# EAGLE board ShieldMega - LC (EAGLE 6.2)
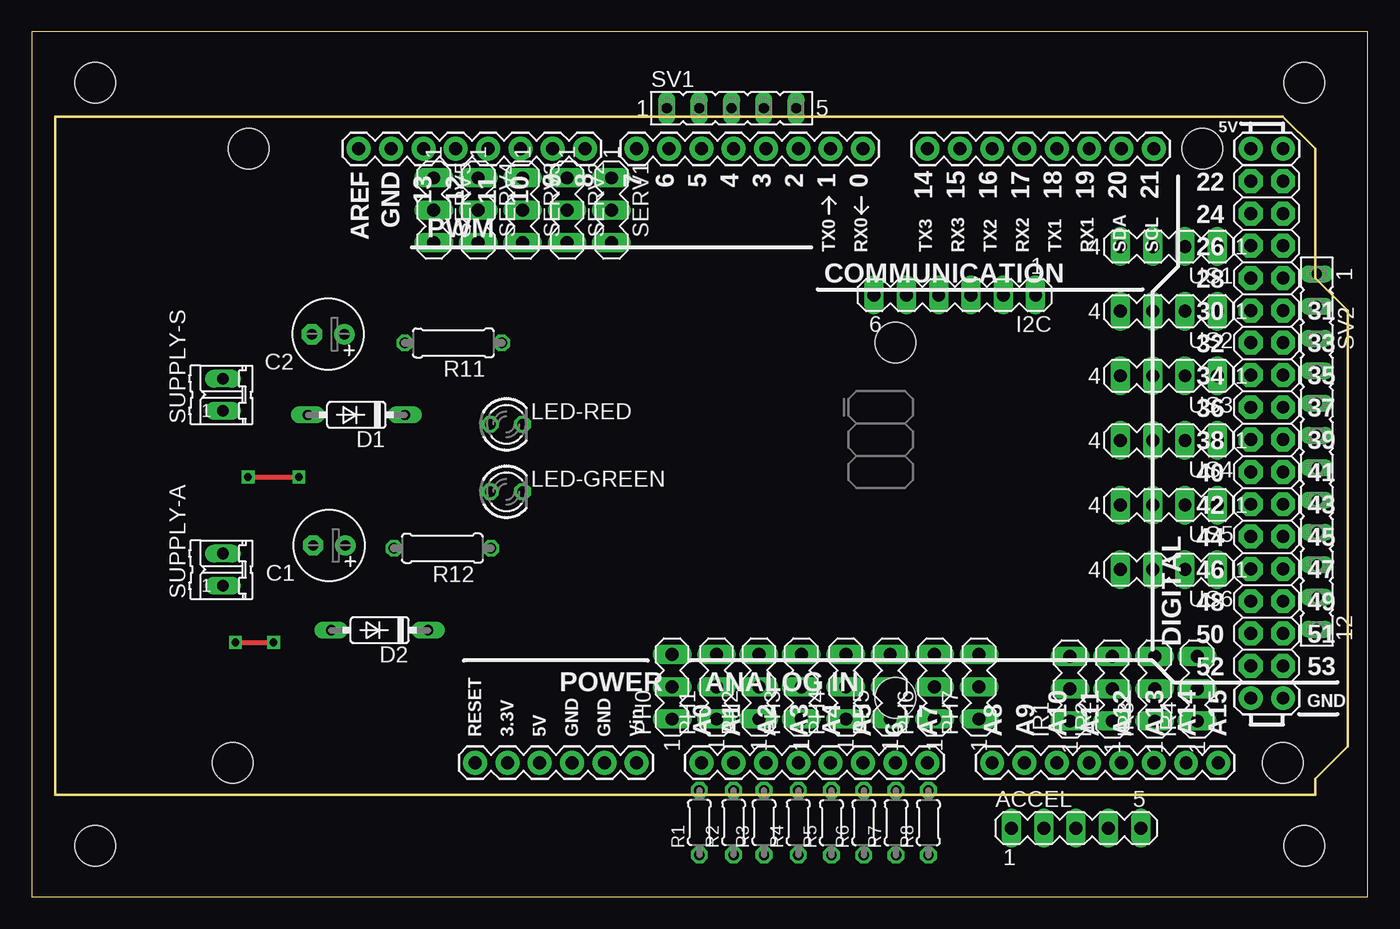
[diagram p0: board, top side]
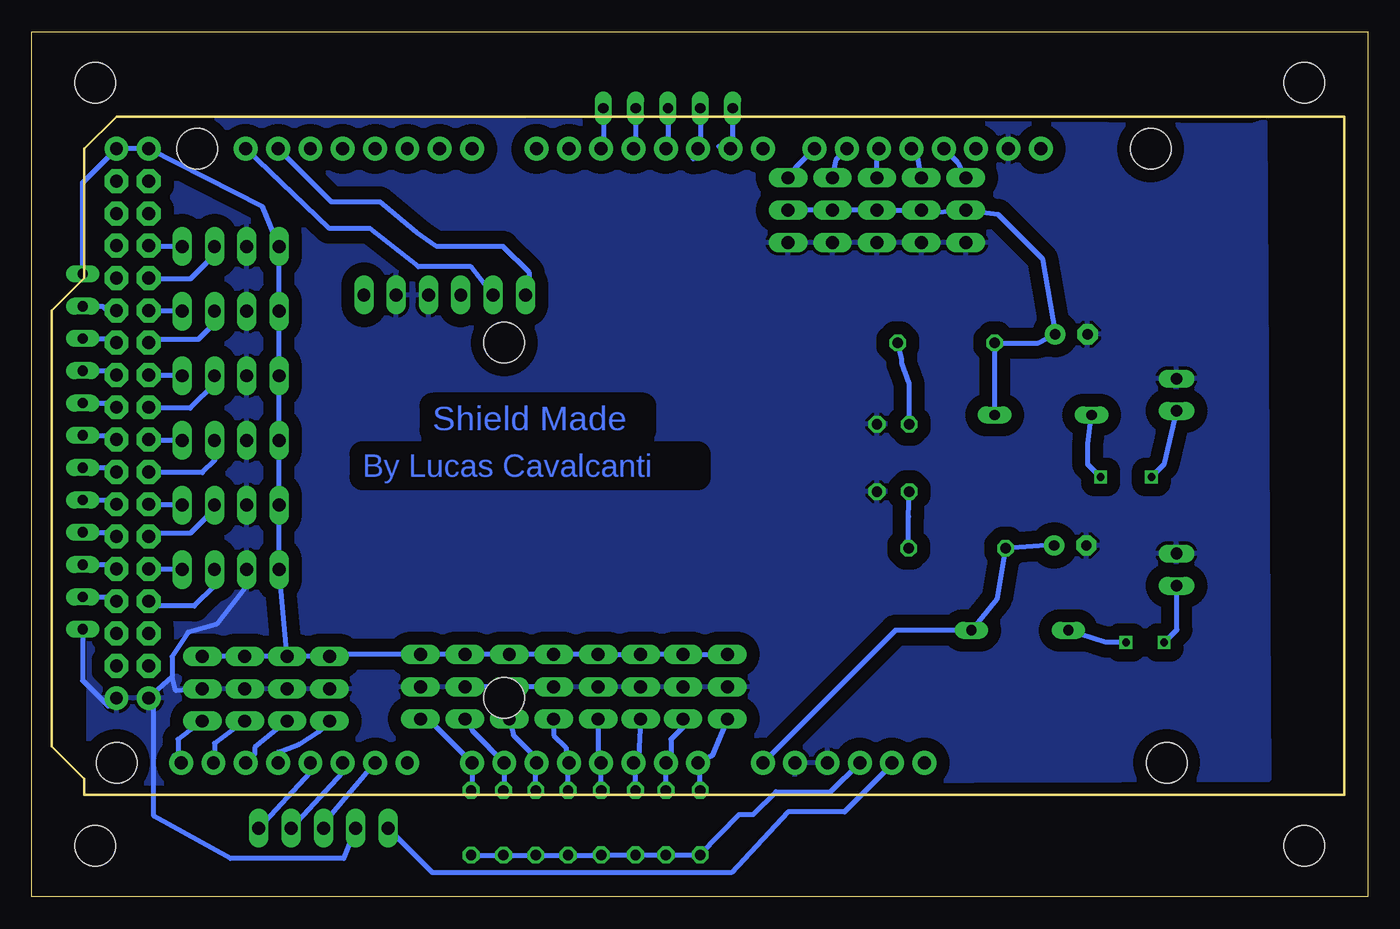
[diagram p1: board, bottom side, seen from below]

Size 105 x 68 mm. Coordinates in mm from the lower left corner, seen from the top.
Outline: 0,0 105,0 105,68 0,68 0,0
Copper layers (1*16): Top 0.035mm / dielectric 1.5mm / Bottom 0.035mm
Design rules: minimum track width 10mil, minimum drill 24mil, track to track 8mil, track to pad 8mil, pad to pad 8mil, via to via 8mil, smd to smd 5mil, copper to edge 0mil, drill to drill 0mil, minimum pad ring 10mil, minimum via ring 8mil, stop-mask expansion 4mil, vias tented up to drill 0mil, thermal gap 10mil
Holes 3.2 mm at 5,4 5,64 100,64 100,4

## Footprints (pad centres in the part's own frame; a part is rotated, then mirrored left to right if it is on the bottom)
MA05-1 = drill 1.016 long: 1 -5.08,0; 2 -2.54,0; 3 0,0; 4 2.54,0; 5 5.08,0
E2,5-6 = drill 0.813 pad 1.6: + -1.27,0 | drill 0.813 pad 1.6 octagon: - 1.27,0
DO35-7 = drill 0.813 long: A 3.81,0; C -3.81,0
MA06-1 = drill 1.016 long: 1 -6.35,0; 2 -3.81,0; 3 -1.27,0; 4 1.27,0; 5 3.81,0; 6 6.35,0
MA03-1 = drill 1.016 long: 1 -2.54,0; 2 0,0; 3 2.54,0
LED3MM = drill 0.813 octagon: A -1.27,0; K 1.27,0
0204/5 = drill 0.813 octagon: 1 -2.54,0; 2 2.54,0
0207/7 = drill 0.813 octagon: 1 -3.81,0; 2 3.81,0
02P = drill 0.914 long: 1 -1.27,0; 2 1.27,0
FE05-1 = drill 0.813 long: 1 -5.08,0; 2 -2.54,0; 3 0,0; 4 2.54,0; 5 5.08,0
FE12 = drill 0.813 long: 1 -13.97,0; 2 -11.43,0; 3 -8.89,0; 4 -6.35,0; 5 -3.81,0; 6 -1.27,0; 7 1.27,0; 8 3.81,0; 9 6.35,0; 10 8.89,0; 11 11.43,0; 12 13.97,0
ARDUINO_MEGA = drill 1.016 pad 1.88: 0 63.5,50.8; 1 60.96,50.8; 2 58.42,50.8; 3 55.88,50.8; 3.3V 35.56,2.54; 4 53.34,50.8; 5 50.8,50.8; 5V@0 38.1,2.54; 5V@1 93.98,50.8; 5V@2 96.52,50.8; 6 48.26,50.8; 7 45.72,50.8; 8 41.656,50.8; 9 39.116,50.8; 10 36.576,50.8; 11 34.036,50.8; 12 31.496,50.8; 13 28.956,50.8; 14 68.58,50.8; 15 71.12,50.8; 16 73.66,50.8; 17 76.2,50.8; 18 78.74,50.8; 19 81.28,50.8; 20 83.82,50.8; 21 86.36,50.8; A0 50.8,2.54; A1 53.34,2.54; A2 55.88,2.54; A3 58.42,2.54; A4 60.96,2.54; A5 63.5,2.54; A6 66.04,2.54; A7 68.58,2.54; A8 73.66,2.54; A9 76.2,2.54; A10 78.74,2.54; A11 81.28,2.54; A12 83.82,2.54; A13 86.36,2.54; A14 88.9,2.54; A15 91.44,2.54; AREF 23.876,50.8; GND@0 40.64,2.54; GND@1 43.18,2.54; GND@2 93.98,7.62; GND@3 96.52,7.62; GND@4 26.416,50.8; RESET 33.02,2.54; VIN 45.72,2.54 | drill 1.016 pad 1.88 octagon: 22 93.98,48.26; 23 96.52,48.26; 24 93.98,45.72; 25 96.52,45.72; 26 93.98,43.18; 27 96.52,43.18; 28 93.98,40.64; 29 96.52,40.64; 30 93.98,38.1; 31 96.52,38.1; 32 93.98,35.56; 33 96.52,35.56; 34 93.98,33.02; 35 96.52,33.02; 36 93.98,30.48; 37 96.52,30.48; 38 93.98,27.94; 39 96.52,27.94; 40 93.98,25.4; 41 96.52,25.4; 42 93.98,22.86; 43 96.52,22.86; 44 93.98,20.32; 45 96.52,20.32; 46 93.98,17.78; 47 96.52,17.78; 48 93.98,15.24; 49 96.52,15.24; 50 93.98,12.7; 51 96.52,12.7; 52 93.98,10.16; 53 96.52,10.16 | hole 3.2: 15.24,50.8; 13.97,2.54; 66.04,35.56; 66.04,7.62; 90.17,50.8; 96.52,2.54
MA04-1 = drill 1.016 long: 1 -3.81,0; 2 -1.27,0; 3 1.27,0; 4 3.81,0

## Placement (x,y rotation side)
ACCEL  [MA05-1]  82.07,5.4 0 top
C1  [E2,5-6]  23.38,27.62 180 top
C2  [E2,5-6]  23.29,44.23 180 top
D1  1N4148DO35-7  [DO35-7]  25.51,37.88 180 top
D2  1N4148DO35-7  [DO35-7]  27.34,20.95 180 top
I2C  [MA06-1]  72.55,47.31 180 top
IR1  [MA03-1]  81.6,16.35 90 top
IR2  [MA03-1]  84.93,16.35 90 top
IR3  [MA03-1]  88.27,16.35 90 top
IR4  [MA03-1]  91.6,16.35 90 top
LED-GREEN  [LED3MM]  37.31,31.84 0 top
LED-RED  [LED3MM]  37.31,37.15 0 top
PH0  [MA03-1]  50.32,16.51 90 top
PH1  [MA03-1]  53.82,16.51 90 top
PH2  [MA03-1]  57.15,16.51 90 top
PH3  [MA03-1]  60.48,16.51 90 top
PH4  [MA03-1]  63.98,16.51 90 top
PH5  [MA03-1]  67.47,16.51 90 top
PH6  [MA03-1]  70.96,16.51 90 top
PH7  [MA03-1]  74.45,16.51 90 top
R1  [0204/5]  52.47,5.83 90 top
R2  [0204/5]  55.16,5.83 90 top
R3  [0204/5]  57.54,5.83 90 top
R4  [0204/5]  60.24,5.83 90 top
R5  [0204/5]  62.85,5.82 90 top
R6  [0204/5]  65.39,5.82 90 top
R7  [0204/5]  67.93,5.82 90 top
R8  [0204/5]  70.47,5.82 90 top
R11  200  [0207/7]  33.13,43.55 180 top
R12  200  [0207/7]  32.27,27.4 180 top
SERV1  [MA03-1]  45.56,53.98 270 top
SERV2  [MA03-1]  42.07,53.98 270 top
SERV3  [MA03-1]  38.58,53.98 270 top
SERV4  [MA03-1]  35.08,53.98 270 top
SERV5  [MA03-1]  31.59,53.98 270 top
SUPPLY-A  [02P]  15.03,25.72 90 top
SUPPLY-S  [02P]  15.03,39.47 90 top
SV1  [FE05-1]  55,62 0 top
SV2  [FE12]  101,35 270 top
U1  ARDUINO-MEGAFULL  [ARDUINO_MEGA]  1.82,8 0 top
US1  [MA04-1]  89.38,51.12 180 top
US2  [MA04-1]  89.38,46.04 180 top
US3  [MA04-1]  89.38,40.96 180 top
US4  [MA04-1]  89.38,35.88 180 top
US5  [MA04-1]  89.38,30.8 180 top
US6  [MA04-1]  89.38,25.72 180 top

## Library data of the parts
ACCEL I2C IR1-IR4 PH0 PH1-PH7 SERV1-SERV5 US1-US6 = con-lstb; OC_FARNELL: unknown; OC_NEWARK: unknown
C1 C2 R1-R8 R11 R12 = rcl
D1 D2 = diode
LED-GREEN LED-RED = led
SUPPLY-A SUPPLY-S = con-amp-quick; OC_FARNELL: unknown; OC_NEWARK: unknown
SV1 SV2 = con-lsta; OC_FARNELL: unknown; OC_NEWARK: unknown
U1 = SparkFun-Boards

## Nets
3V3: ACCEL.1 U1.3.3V
5V: R1.1 R2.1 R3.1 R4.1 R5.1 R6.1 R7.1 R8.1 U1.5V@0
5VU: IR1.3 IR2.3 IR3.3 IR4.3 PH0.3 PH1.3 PH2.3 PH3.3 PH4.3 PH5.3 PH6.3 PH7.3 SV2.1 U1.5V@1 U1.5V@2 US1.4 US2.4 US3.4 US4.4 US5.4 US6.4
31: SV2.2 U1.31
33: SV2.3 U1.33
35: SV2.4 U1.35
37: SV2.5 U1.37
39: SV2.6 U1.39
41: SV2.7 U1.41
43: SV2.8 U1.43
45: SV2.9 U1.45
47: SV2.10 U1.47
49: SV2.11 U1.49
A0: PH0.1 R1.2 U1.A0
A1: PH1.1 R2.2 U1.A1
A2: PH2.1 R3.2 U1.A2
A3: PH3.1 R4.2 U1.A3
A4: PH4.1 R5.2 U1.A4
A5: PH5.1 R6.2 U1.A5
A6: PH6.1 R7.2 U1.A6
A7: PH7.1 R8.2 U1.A7
ECHO1: U1.28 US1.2
ECHO2: U1.32 US2.2
ECHO3: U1.36 US3.2
ECHO4: U1.40 US4.2
ECHO5: U1.44 US5.2
ECHO6: U1.48 US6.2
GND: ACCEL.2 C1.- C2.- I2C.2 I2C.3 IR1.2 IR2.2 IR3.2 IR4.2 LED-GREEN.K LED-RED.K PH0.2 PH1.2 PH2.2 PH3.2 PH4.2 PH5.2 PH6.2 PH7.2 SERV1.3 SERV2.3 SERV3.3 SERV4.3 SERV5.3 SUPPLY-A.2 SUPPLY-S.2 SV2.12 U1.GND@0 U1.GND@1 U1.GND@2 U1.GND@3 U1.GND@4 US1.3 US2.3 US3.3 US4.3 US5.3 US6.3
IR1: IR1.1 U1.A12
IR2: IR2.1 U1.A13
IR3: IR3.1 U1.A14
IR4: IR4.1 U1.A15
N$1: D2.A SUPPLY-A.1
N$2: SV1.5 U1.2
N$3: D1.A SUPPLY-S.1
N$4: SV1.4 U1.3
N$5: SV1.3 U1.4
N$6: SV1.2 U1.5
N$7: SV1.1 U1.6
N$9: LED-GREEN.A R12.1
N$10: LED-RED.A R11.1
PWM1: SERV1.1 U1.8
PWM2: SERV2.1 U1.9
PWM3: SERV3.1 U1.10
PWM4: SERV4.1 U1.11
PWM5: SERV5.1 U1.12
SCL: I2C.5 U1.21
SDA: I2C.6 U1.20
TRIG1: U1.26 US1.1
TRIG2: U1.30 US2.1
TRIG3: U1.34 US3.1
TRIG4: U1.38 US4.1
TRIG5: U1.42 US5.1
TRIG6: U1.46 US6.1
VIN-A: C1.+ D2.C R12.2 U1.VIN
VIN-S: C2.+ D1.C R11.2 SERV1.2 SERV2.2 SERV3.2 SERV4.2 SERV5.2
X: ACCEL.3 U1.A9
Y: ACCEL.4 U1.A10
Z: ACCEL.5 U1.A11

## Tracks (layer width: path | path; a pad name or v marks a point on that pad's centre or on a via)
3V3
  Bottom 0.406: U1.3.3V 37.38,10.4 41.12,6.67 45.56,6.67 50.01,1.91 73.5,1.91 ACCEL.1
5V
  Bottom 0.406: R8.1 R7.1 R6.1 R5.1 60.89,3.28 R4.1 R3.1 R2.1 R1.1 49.39,6.47 48.3,6.47 46.51,8.26 42.21,8.26 U1.5V@0
5VU
  Bottom 0.406: IR2.3 IR1.3 82.39,19.05 PH7.3 PH6.3 PH5.3 PH4.3 PH3.3 PH2.3 PH1.3 PH0.3 | IR2.3 IR3.3 IR4.3 | IR2.3 US6.4 US5.4 US4.4 US3.4 US2.4 | 85.57,46.67 US2.4 | US2.4 US1.4 86.84,54.24 U1.5V@1 U1.5V@2 101,56.14 SV2.1
31
  Bottom 0.406: SV2.2 99.43,46.43 99,46 98.44,46 U1.31
33
  Bottom 0.406: SV2.3 98.67,43.89 U1.33
35
  Bottom 0.406: SV2.4 98.67,41.35 U1.35
37
  Bottom 0.406: SV2.5 98.67,38.81 U1.37
39
  Bottom 0.406: SV2.6 98.67,36.27 U1.39
41
  Bottom 0.406: SV2.7 98.67,33.73 U1.41
43
  Bottom 0.406: SV2.8 98.67,31.19 U1.43
45
  Bottom 0.406: SV2.9 98.67,28.65 U1.45
47
  Bottom 0.406: SV2.10 98.67,26.11 U1.47
49
  Bottom 0.406: SV2.11 98.67,23.57 U1.49
A0
  Bottom 0.406: R1.2 52.47,10.38 U1.A0 52.55,10.62 51.55,11.06 PH0.1
A1
  Bottom 0.406: R2.2 U1.A1 54.77,10.94 54.77,12.38 53.82,13.34 PH1.1
A2
  Bottom 0.406: R3.2 57.54,10.38 U1.A2 57.31,10.94 PH2.1
A3
  Bottom 0.406: R4.2 U1.A3 60.48,10.78 PH3.1
A4
  Bottom 0.406: R5.2 62.85,10.47 U1.A4 63.02,10.78 63.02,11.75 63.98,12.7 PH4.1
A5
  Bottom 0.406: R6.2 65.39,10.47 U1.A5 64.94,10.16 64.93,10.16 65.56,10.79 65.56,11.11 67.15,12.7 PH5.1
A6
  Bottom 0.406: R7.2 67.86,8.74 U1.A6 70.33,13 PH6.1
A7
  Bottom 0.406: PH7.1 73.5,13.64 U1.A7 70.4,8.74 R8.2
ECHO1
  Bottom 0.406: US1.2 90.65,50.48 92.55,48.58 95.74,48.58 U1.28
ECHO2
  Bottom 0.406: US2.2 90.65,45.09 91.92,43.81 95.55,43.81 U1.32
ECHO3
  Bottom 0.406: US3.2 90.65,40.32 92.55,38.42 95.74,38.42 U1.36
ECHO4
  Bottom 0.406: US4.2 90.65,34.29 91.6,33.34 95.74,33.34 U1.40
ECHO5
  Bottom 0.406: US5.2 90.65,30.48 92.55,28.57 95.55,28.57 U1.44
ECHO6
  Bottom 0.406: US6.2 90.65,24.45 92.23,22.86 95.42,22.86 U1.48
GND
  Bottom 0.406: ACCEL.2 80.49,3.02 89.38,3.02 95.41,6.35 95.41,15.22 U1.GND@2 93.98,17.29 | US6.3 88.11,24.45 90.49,21.43 92.71,20.8 93.98,18.89 93.98,17.29 | IR4.2 93.68,16.19 93.98,17.29 | PH4.2 PH5.2 PH6.2 | SV2.12 101,17 99,15 98.96,15 U1.GND@3
  pour Bottom (isolate 1.016): 8.1,60.96 7.78,9.21 100.49,8.89 100.49,61.28 9.05,60.64
IR1
  Bottom 0.406: 81.71,13.47 IR1.1 82.41,13 84,12 85.64,11.36 U1.A12
IR2
  Bottom 0.406: IR2.1 87.47,11.75 87.47,11.25 U1.A13
IR3
  Bottom 0.406: IR3.1 90.65,12.06 90.65,10.62 U1.A14
IR4
  Bottom 0.406: 93.82,11.1 93.67,10.95 | 93.67,10.95 U1.A15 | IR4.1 93.5,12.38 93.5,11.11 93.67,10.95
N$1  (via drill 0.6)
  Top 0.406: v16,20 v19,20
  Bottom 0.406: SUPPLY-A.1 15.03,21.03 15,21 v16,20 | v19,20 20.57,20 D2.A
N$2
  Bottom 0.406: SV1.5 60.08,58.96 U1.2
N$3  (via drill 0.6)
  Top 0.406: v17,33 v21,33
  Bottom 0.406: 22.38,38.2 D1.A 22,35.58 22,34 v21,33 | SUPPLY-S.1 16.03,33.97 v17,33
N$4
  Bottom 0.406: SV1.4 57.54,58.96 U1.3
N$5
  Bottom 0.406: SV1.3 55,58.96 U1.4
N$6
  Bottom 0.406: SV1.2 52.46,58.54 53,58 53,59 52.82,59 U1.5
N$7
  Bottom 0.406: SV1.1 49.92,58.08 50,58 51,59 50.28,59 U1.6
N$9
  Bottom 0.406: R12.1 36.08,29.89 LED-GREEN.A
N$10
  Bottom 0.406: LED-RED.A 36.04,40.32 36.62,41.91 36.62,42.23 R11.1
PWM1
  Bottom 0.406: SERV1.1 44.93,57.35 U1.8
PWM2
  Bottom 0.406: SERV2.1 41.75,57.99 U1.9
PWM3
  Bottom 0.406: SERV3.1 38.58,58.62 U1.10
PWM4
  Bottom 0.406: SERV4.1 35.4,58.34 U1.11
PWM5
  Bottom 0.406: SERV5.1 32.23,57.71 U1.12
SCL
  Bottom 0.406: I2C.5 70.48,49.53 74.61,49.53 78.42,52.55 81.61,52.55 U1.21
SDA
  Bottom 0.406: I2C.6 65.88,46.67 65.88,49.05 67.94,51.12 73.18,51.12 74.77,52.23 77.63,54.61 81.44,54.61 U1.20
TRIG1
  Bottom 0.406: US1.1 95.74,51.12 U1.26
TRIG2
  Bottom 0.406: U1.30 93.25,46.1 US2.1
TRIG3
  Bottom 0.406: U1.34 93.25,41.02 US3.1
TRIG4
  Bottom 0.406: US4.1 95.74,35.88 U1.38
TRIG5
  Bottom 0.406: U1.42 93.25,30.86 US5.1
TRIG6
  Bottom 0.406: US6.1 95.74,25.72 U1.46
VIN-A
  Bottom 0.406: C1.+ 25.24,27.62 R12.2 29.15,23.4 D2.C 37.13,20.95 U1.VIN
VIN-S
  Bottom 0.406: D1.C R11.2 25.88,43.55 C2.+ 25.56,50.16 29.05,53.66 SERV5.2 35.08,53.66 SERV4.2 SERV3.2 SERV2.2 SERV1.2
X
  Bottom 0.406: ACCEL.3 81.44,6.49 U1.A9
Y
  Bottom 0.406: U1.A10 80.56,9.77 ACCEL.4
Z
  Bottom 0.406: U1.A11 83.1,9.77 ACCEL.5

## Text on the board
Bottom: Shield Made | By Lucas Cavalcanti